# EAGLE board output stage and VCA v2 (EAGLE 9.5.2)
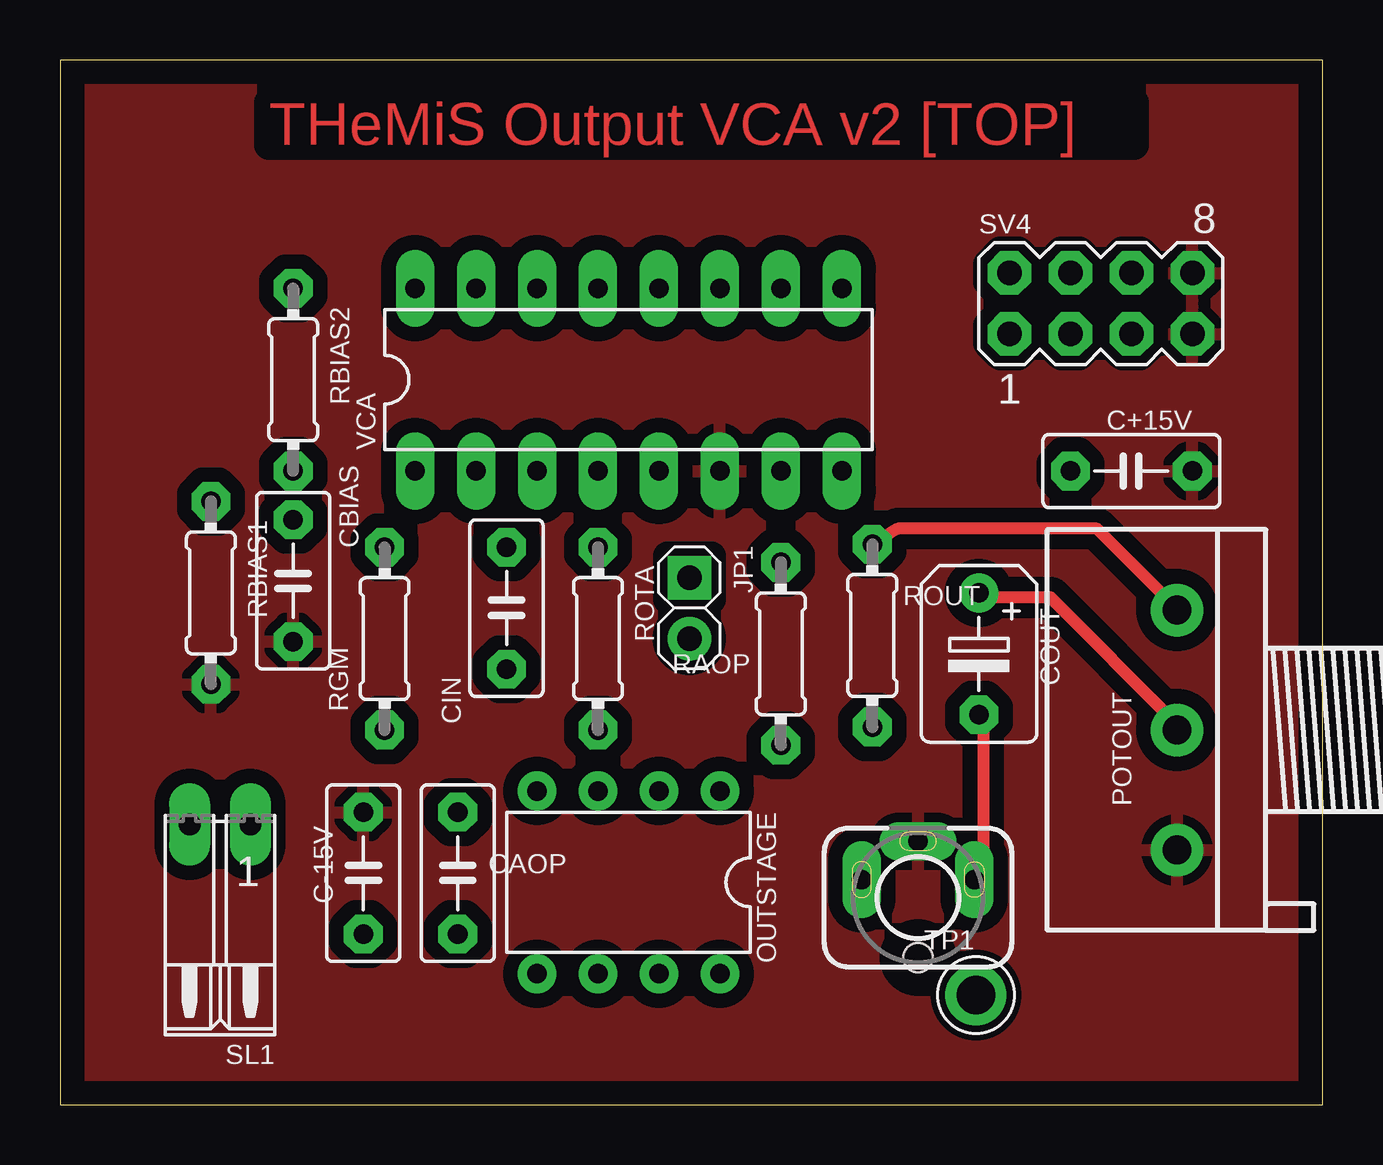
[diagram p0: board, top side]
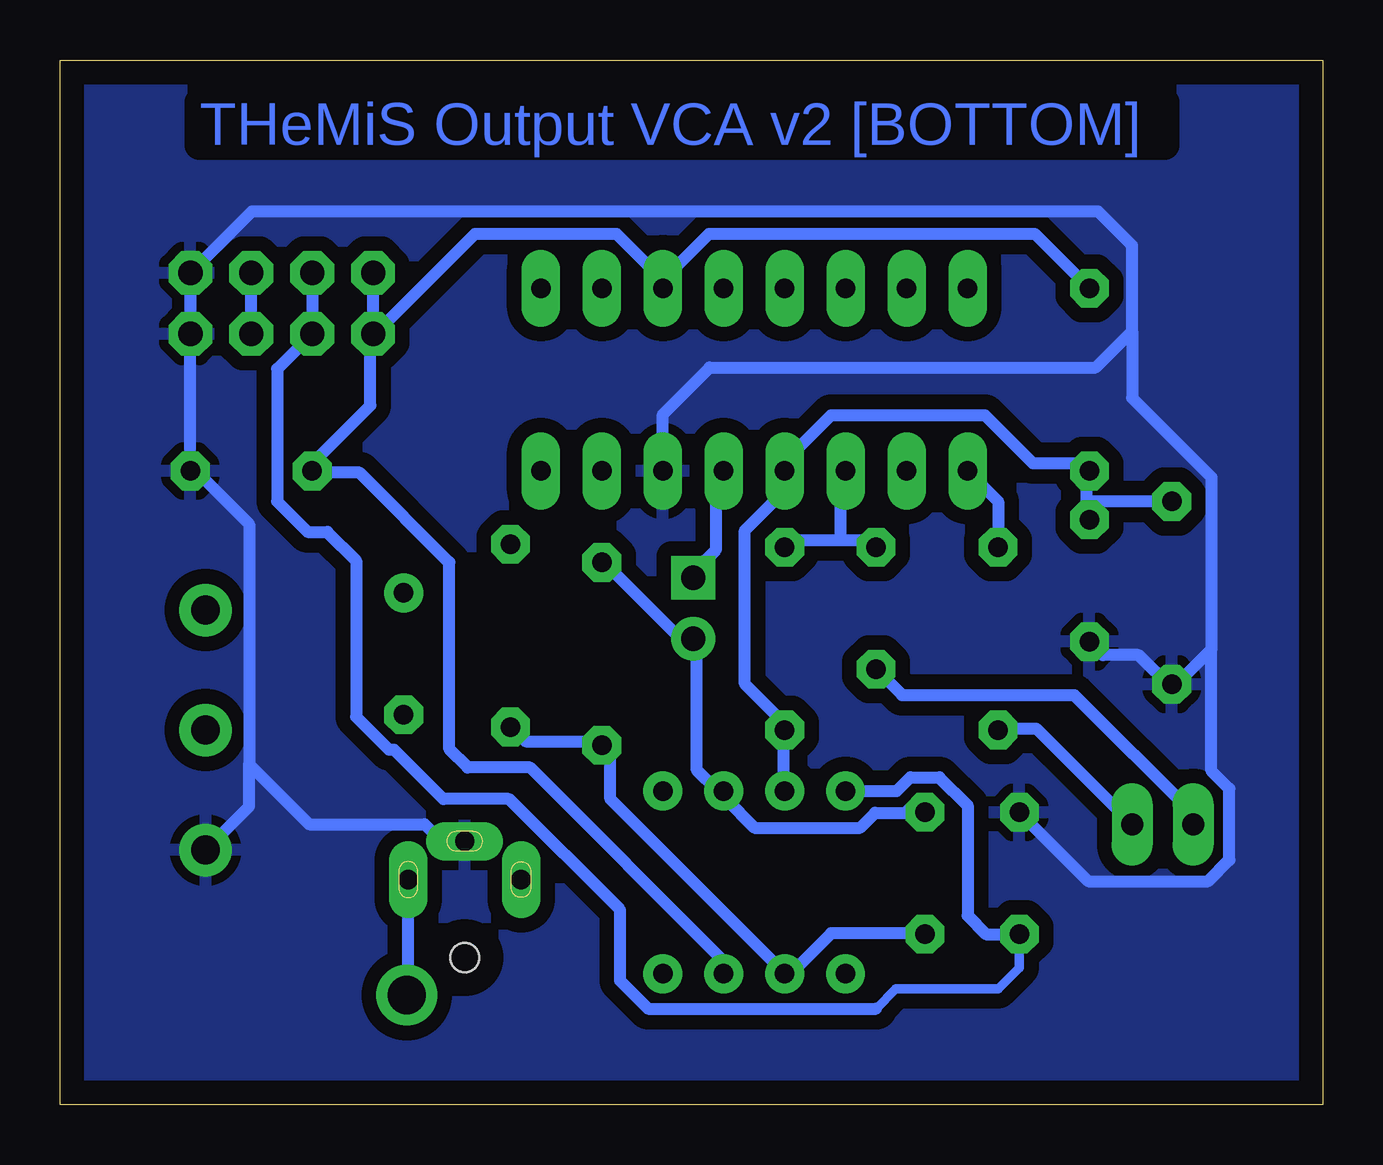
[diagram p1: board, bottom side, seen from below]

Size 52.61 x 43.55 mm. Coordinates in mm from the lower left corner, seen from the top.
Outline: 0,0 52.61,0 52.61,43.55 0,43.55 0,0
Copper layers (1*16): Top 0.035mm / dielectric 1.5mm / Bottom 0.035mm
Design rules "ENSEA_2019": minimum track width 0.4mm, minimum drill 0.6mm, track to track 0.4mm, track to pad 0.4mm, pad to pad 0.4mm, via to via 0.4mm, smd to smd 0.4mm, copper to edge 1mm, drill to drill 0.4mm, minimum pad ring 0.4mm, minimum via ring 0.4mm, stop-mask expansion 4mil, vias tented up to drill 0mil, thermal gap 0.4mm

## Footprints (pad centres in the part's own frame; a part is rotated, then mirrored left to right if it is on the bottom)
C050-030X075 = drill 0.813 octagon: 1 -2.54,0; 2 2.54,0
B45181B = drill 0.813: + -2.54,0 | drill 0.813 octagon: - 2.54,0
HDR2X1 = drill 1.016 square: 1 0,0 | drill 1.016: 2 2.54,0
1502_01 = drill 0.8 pad 1.2 long: 1 0,2.35; 2 -2.35,0.75; 3 2.35,0.75 | hole 1.2: 0,-2.5
DIL08 = drill 0.813 pad 1.27: 1 -3.81,-3.81; 2 -1.27,-3.81; 3 1.27,-3.81; 4 3.81,-3.81; 5 3.81,3.81; 6 1.27,3.81; 7 -1.27,3.81; 8 -3.81,3.81
3RP/1610N = drill 1.2 pad 2.184: 1 -5,0; 2 0,0; 3 5,0
0204/7 = drill 0.813 octagon: 1 -3.81,0; 2 3.81,0
02PA = drill 0.914 long: 1 -1.27,0; 2 1.27,0
MA04-2 = drill 1.016 octagon: 1 -3.81,-1.27; 2 -3.81,1.27; 3 -1.27,-1.27; 4 -1.27,1.27; 5 1.27,-1.27; 6 1.27,1.27; 7 3.81,-1.27; 8 3.81,1.27
TESTPOINT_63 = drill 1.6 pad 2.54: P$1 0,0
DIL16 = drill 0.813 long: 1 -8.89,-3.81; 2 -6.35,-3.81; 3 -3.81,-3.81; 4 -1.27,-3.81; 5 1.27,-3.81; 6 3.81,-3.81; 7 6.35,-3.81; 8 8.89,-3.81; 9 8.89,3.81; 10 6.35,3.81; 11 3.81,3.81; 12 1.27,3.81; 13 -1.27,3.81; 14 -3.81,3.81; 15 -6.35,3.81; 16 -8.89,3.81

## Placement (x,y rotation side)
C+15V  100n  [C050-030X075]  44.64,26.41 180 top
C-15V  100n  [C050-030X075]  12.64,9.65 90 top
CAOP  560p  [C050-030X075]  16.57,9.65 90 top
CBIAS  1u  [C050-030X075]  9.71,21.84 270 top
CIN  1u  [C050-030X075]  18.6,20.7 90 top
COUT  22u  [B45181B]  38.29,18.8 270 top
JP1  JUMPER  [HDR2X1]  26.23,21.97 270 top
OUTPUT_JACK  1502_01  [1502_01]  35.75,8.63 0 top
OUTSTAGE  NE5534AN  [DIL08]  23.69,9.27 180 top
POTOUT  100kB  [3RP/1610N]  46.55,15.62 90 top
RAOP  27k  [0204/7]  30.04,18.8 90 top
RBIAS1  1k  [0204/7]  6.29,21.34 270 top
RBIAS2  1k  [0204/7]  9.71,30.23 270 top
RGM  50k  [0204/7]  13.53,19.43 90 top
ROTA  10k  [0204/7]  22.41,19.43 270 top
ROUT  470  [0204/7]  33.84,19.56 270 top
SL1  [02PA]  6.67,11.68 180 top
SV4  [MA04-2]  43.37,33.4 0 top
TP1  [TESTPOINT_63]  38.16,4.57 0 top
VCA  LM13700N  [DIL16]  23.69,30.23 0 top

## Library data of the parts
C+15V C-15V CAOP CBIAS CIN = rcl; SPICEPREFIX: C
COUT = resistor
JP1 TP1 = 6P1_EVB
OUTPUT_JACK = con-lumberg; OC_FARNELL: 4739747; OC_NEWARK: unknown
OUTSTAGE = linear
POTOUT = pot
RAOP RBIAS1 RBIAS2 RGM ROTA ROUT = rcl; SPICEPREFIX: R
SL1 = con-amp-quick; OC_FARNELL: unknown; OC_NEWARK: unknown
SV4 = con-lstb; OC_FARNELL: unknown; OC_NEWARK: unknown
VCA = ota

## Nets
5V: SV4.5 SV4.6
+15V: C+15V.2 OUTSTAGE.7 RBIAS2.1 SV4.1 SV4.2 VCA.11
-15V: C-15V.1 OUTSTAGE.4 SV4.3 SV4.4
AGND: C+15V.1 C-15V.2 CBIAS.2 OUTPUT_JACK.1 POTOUT.1 RBIAS1.2 SV4.7 SV4.8 VCA.6
CV: RGM.1 SL1.1
IN: CIN.1 SL1.2
IN_I: CAOP.2 JP1.2 OUTSTAGE.2 RAOP.2
MAIN_OUT: CAOP.1 OUTSTAGE.6 RAOP.1 ROUT.2
N$5: JP1.1 VCA.5
N$6: RGM.2 VCA.1
N$7: CIN.2 ROTA.1 VCA.3
N$8: COUT.+ POTOUT.2
N$9: POTOUT.3 ROUT.1
OUT: COUT.- OUTPUT_JACK.3 TP1.P$1
VBIAS: CBIAS.1 OUTSTAGE.3 RBIAS1.1 RBIAS2.2 ROTA.2 VCA.4

## Tracks (layer width: path | path; a pad name or v marks a point on that pad's centre or on a via)
5V
  Bottom 0.508: SV4.5 SV4.6
+15V
  Bottom 0.508: OUTSTAGE.7 24.95,5.99 33.02,14.05 35.62,14.05 36.38,14.81 36.38,22.6 40.12,26.34 42.08,26.34 C+15V.2 42.08,26.74 39.68,29.14 39.68,31.55 | 39.68,31.55 39.68,31.95 | 39.68,31.95 SV4.1 | 39.68,31.55 SV4.1 | SV4.1 SV4.2 | RBIAS2.1 9.73,34.03 12,36.3 25.56,36.3 27.5,34.37 | 39.68,31.95 35.32,36.3 29.43,36.3 27.5,34.37 | 27.5,34.37 VCA.11
-15V
  Bottom 0.4: 18.6,4 17.78,4.82 13.53,4.82 12.64,5.71 C-15V.1
  Bottom 0.508: SV4.4 SV4.3 43.56,30.67 43.56,25.14 42.29,23.88 41.47,23.88 40.27,22.69 40.27,16.17 38.9,14.8 38.69,14.8 36.64,12.74 33.9,12.74 29.27,8.12 29.27,5.17 28.1,4 18.6,4 | OUTSTAGE.4 17.75,13.08 17.18,13.65 15.97,13.65 14.79,12.48 14.79,7.87 14.03,7.11 C-15V.1
AGND
  Bottom 0.508: 6.28,17.35 7.67,18.74 9.16,18.74 CBIAS.2 9.67,19.34 | 6.28,17.35 RBIAS1.2 | OUTPUT_JACK.1 36.08,11.14 36.88,11.14 37.42,11.69 42.23,11.69 44.73,14.19 | 46.48,10.74 POTOUT.1 44.73,12.44 44.73,14.19 | 44.73,14.19 44.73,24.2 46.88,26.34 C+15V.1 SV4.7 SV4.8 44.62,37.23 9.36,37.23 7.94,35.81 7.94,32.26 | VCA.6 27.5,28.78 25.54,30.73 9.46,30.73 7.94,32.26 | 4.63,18.99 4.63,26.16 7.94,29.46 7.94,32.26 | 4.63,18.99 6.28,17.35 | 4.63,18.99 4.63,13.91 3.89,13.17 3.89,10.2 4.77,9.31 9.76,9.31 C-15V.2
  pour Bottom (isolate 0.61): 0.82,42.92 51.62,42.92 51.62,1.02 0.82,1.02
  pour Top (isolate 0.61): 0.82,42.92 51.62,42.92 51.62,1.02 0.82,1.02
CV
  Bottom 0.508: RGM.1 13.46,15.68 11.94,15.68 SL1.1
IN
  Bottom 0.508: CIN.1 17.52,17.08 10.34,17.08 5.4,12.14 SL1.2
IN_I
  Bottom 0.508: RAOP.2 29.68,22.34 26.48,19.14 JP1.2 26.08,19.14 26.08,13.95 25.27,13.14 OUTSTAGE.2 24.88,12.74 23.67,11.55 19.27,11.55 18.65,12.17 17.37,12.17 17.2,12.34 16.91,12.34 CAOP.2
MAIN_OUT
  Bottom 0.508: ROUT.2 33.2,15.14 30.08,15.14 RAOP.1 29.68,14.74 29.68,12.74 22.48,5.54 OUTSTAGE.6 22.08,5.54 20.48,7.14 16.61,7.14 CAOP.1
N$5
  Bottom 0.508: VCA.5 25.27,26.34 25.27,23.14 26.08,22.34 JP1.1
N$6
  Bottom 0.508: VCA.1 13.53,25.14 RGM.2
N$7
  Bottom 0.508: 20.08,23.55 22.08,23.55 ROTA.1 | 20.08,23.55 18.88,23.55 CIN.2 | 20.08,23.55 20.08,26.34 VCA.3
N$8
  Top 0.508: COUT.+ 38.48,21.14 41.27,21.14 46.48,15.95 POTOUT.2
N$9
  Top 0.508: ROUT.1 34.91,24.02 43.2,24.02 46.48,20.74 POTOUT.3
OUT
  Top 0.508: OUTPUT_JACK.3 38.48,9.55 38.48,15.95 COUT.-
  Bottom 0.508: 38.16,9.32 OUTPUT_JACK.3 38.1,4.63 TP1.P$1
VBIAS
  Bottom 0.508: 9.82,25.14 9.82,24.4 CBIAS.1 | 9.82,25.14 9.82,26.39 RBIAS2.2 10.07,26.74 12.08,26.74 14.08,28.74 20.48,28.74 22.48,26.74 VCA.4 22.48,26.34 22.48,25.55 24.08,23.95 24.08,17.55 22.48,15.95 ROTA.2 22.48,15.55 22.48,13.14 OUTSTAGE.3 | RBIAS1.1 9.82,25.14

## Text on the board
Top: THeMiS Output VCA v2 [TOP]
Bottom: THeMiS Output VCA v2 [BOTTOM]